# Altium PCB PCB1.PcbDoc
Units mil, origin at the board's own origin, x right, y up, seen from the top; angles counter-clockwise.
Board outline 3000.03 x 4310.03 mil, 2 copper layers (Top Layer, Bottom Layer); 7 components, 5 nets, 17 pads, 2 vias.
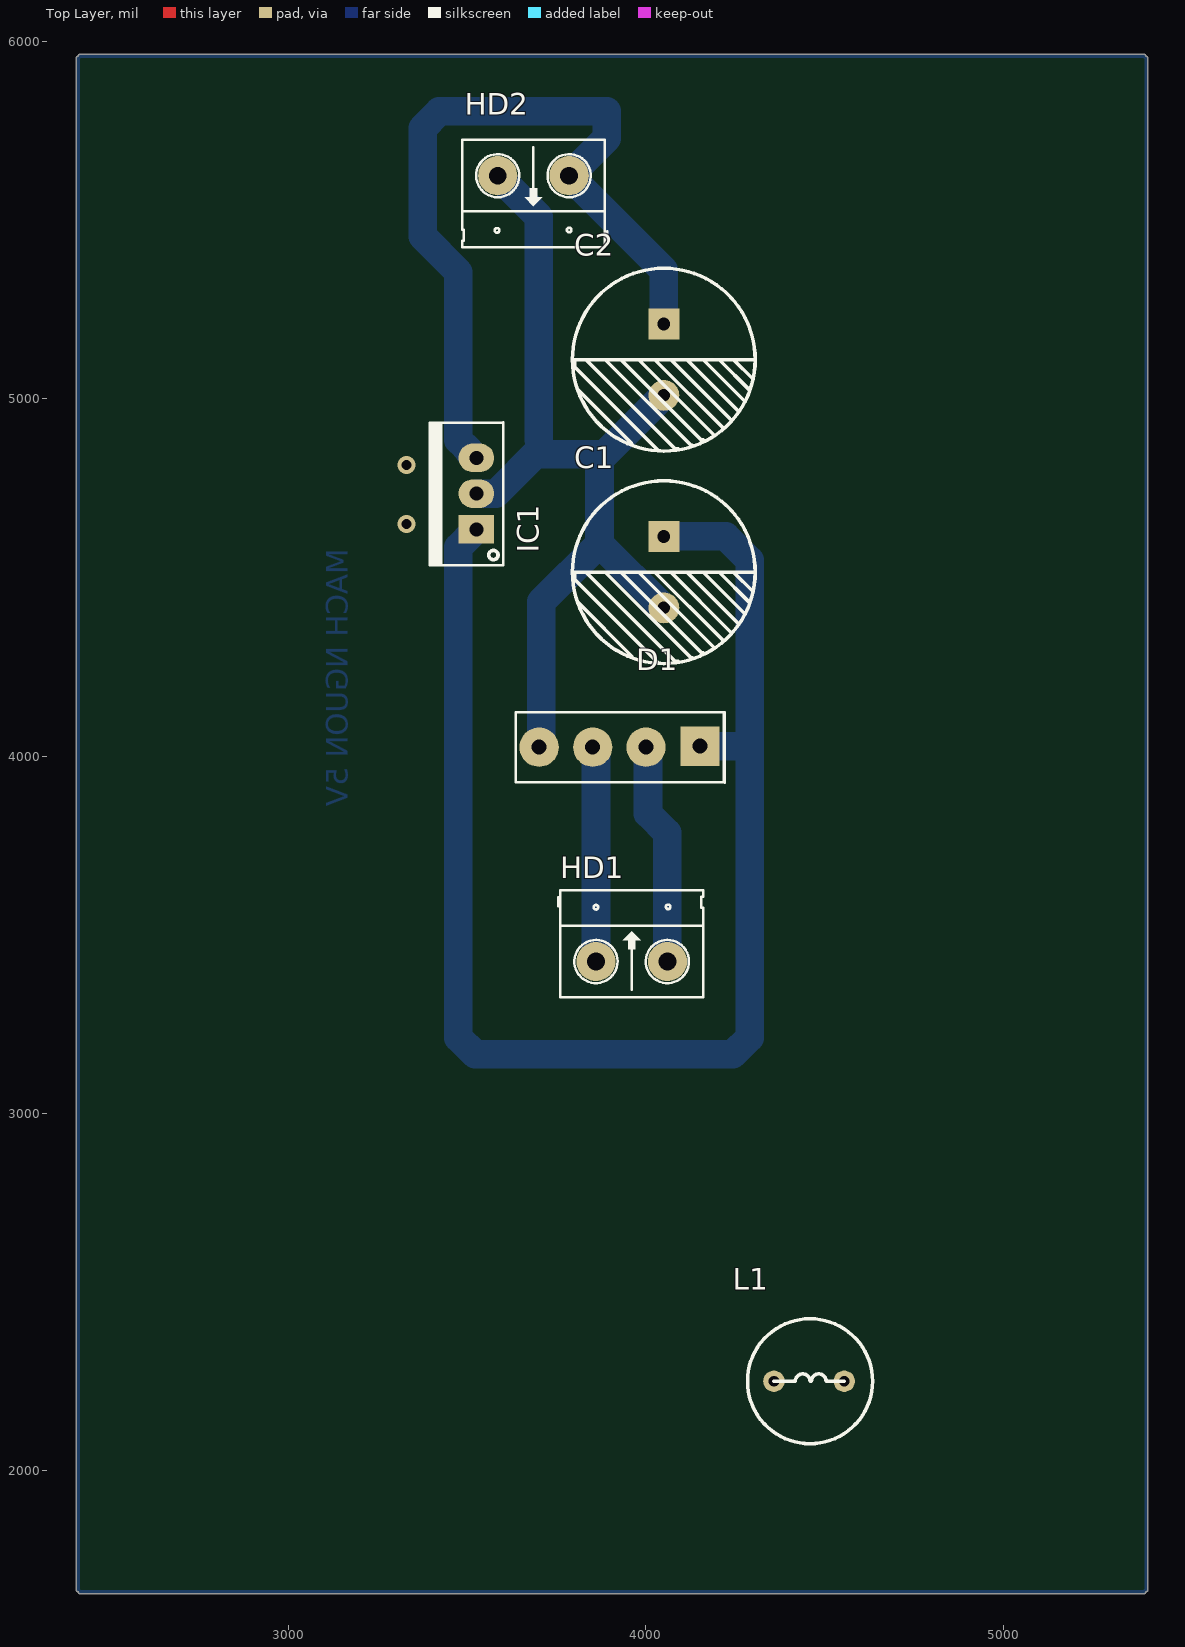
[diagram p0: Top Layer view]
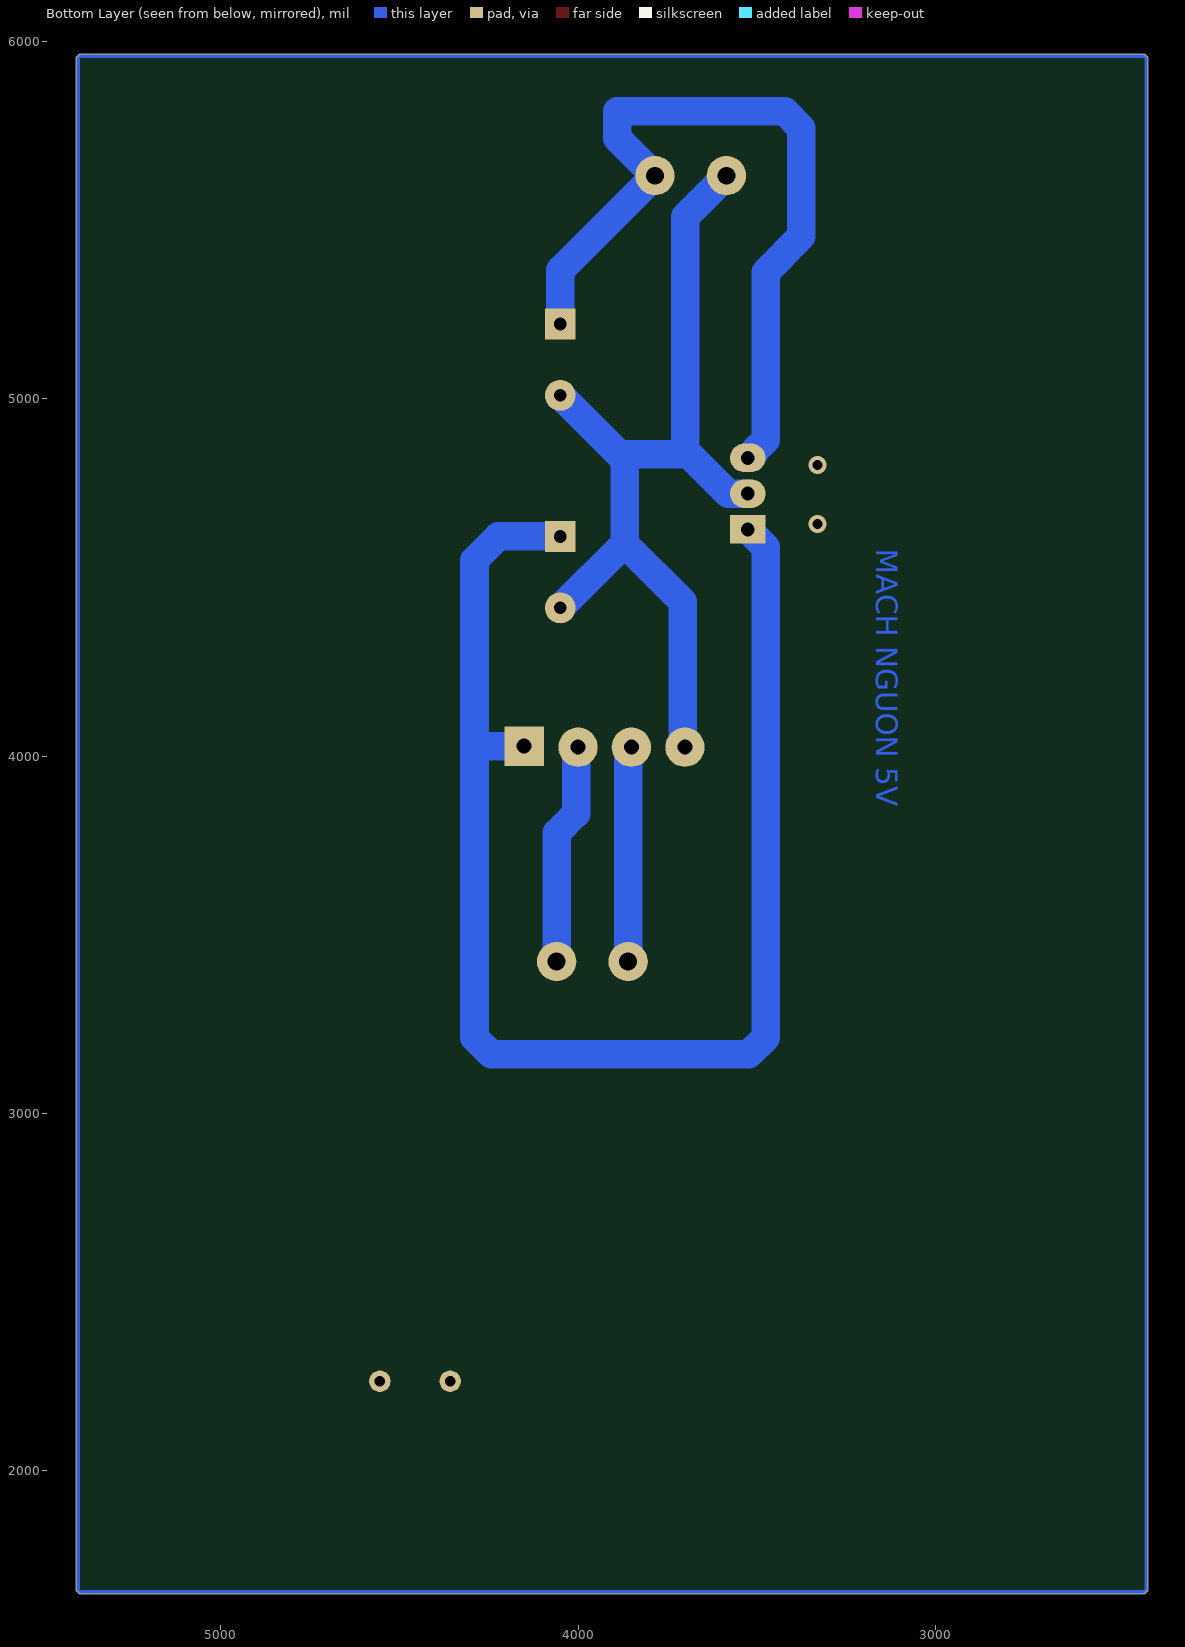
[diagram p1: Bottom Layer view, seen from below]
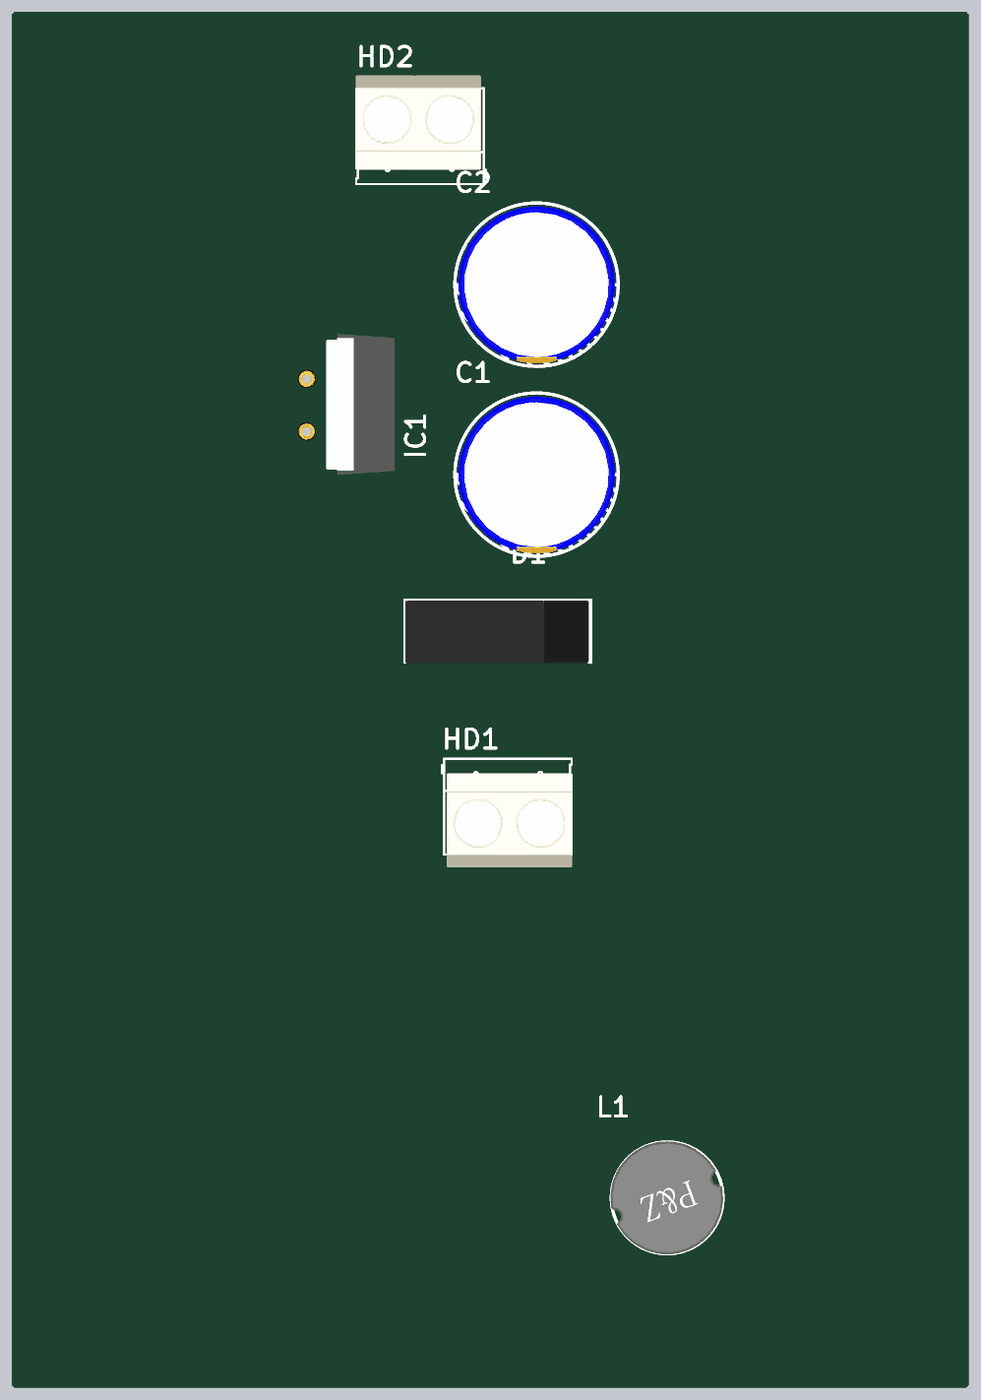
[diagram p2: 3D render of the assembled board from above, using the file's embedded part models]

## Layer stack, top to bottom
Top Solder: solder mask 0.4, Solder Resist, Dk 3.5
Top Layer: signal copper 1.4
Dielectric 1: dielectric 12.6, FR-4, Dk 4.8
Bottom Layer: signal copper 1.4
Bottom Solder: solder mask 0.4, Solder Resist, Dk 3.5

## Board outline
5394.14,1654.98 ccw(c5394.14,1660) 5399.07,1660.93 ccw(c5400,1665.86) 5405.02,1665.86 5405.02,5954.14 ccw(c5400,5954.14) 5400,5959.16 5399.07,5959.07 ccw(c5394.14,5960) 5394.14,5965.02 2415.86,5965.02 ccw(c2415.86,5960) 2410.93,5959.07 2410,5959.16 ccw(c2410,5954.14) 2404.99,5954.14 2404.99,1665.86 ccw(c2410,1665.86) 2410.93,1660.93 ccw(c2415.86,1660) 2415.86,1654.98

## Design rules (kind name [scope] priority, off if disabled: settings)
Clearance [All] p1: gap=20 ignorepadtopadclearanceinfootprint=FALSE
PolygonConnect [All] p1: connectstyle=Relief reliefconductorwidth=10 reliefentries=4 polygonreliefangle="90 Angle" airgapwidth=10
RoutingVias [All] p1: holewidth=28 width=50 viastyle="Through Hole" minholewidth=28 minwidth=50 maxholewidth=28 maxwidth=50
SolderMaskExpansion [All] p1: expansion=4 istentingtop=FALSE
SupplyNets "Schematic Supply Nets" [InNet('GND')] p1: voltage=0.000
Width [All] p1: maxlimit=80 minlimit=80 preferedwidth=80
30 further rules are at their usual default settings.

## Components (designator, comment, footprint, x,y, rotation, side; value= is the part's Value field where it differs from the comment)
C1 "1000uF" "tu hoa 13mm" 4050,4515 r270 top
C2 "1000uF" "tu hoa 13mm" 4050,5110 r270 top
D1 "2A 600V" "DIODE CAU 2A 3A CAM" 4151,4026 r180 top
HD1 "Header 2" HED2 3860,3425 r0 top
HD2 "Header 2" HED2 3785,5625 r180 top
IC1 "LM7805" QTO-220 3525,4635 r90 top
L1 "Inductor" Inductor 4358.15,2250 r0 top

## Footprints (in the part's own frame and the unit in brackets; to place one, negate y for a bottom-side part, rotate by r counter-clockwise, add the part's x,y. Pads: shape width x height; smd on the part's side, far side on the other; paste and mask are expansions set on the pad)
"DIODE CAU 2A 3A CAM" [mil] "DIODE CAU 2A 3A CAM"
  rect 110x110 hole 42: 1(0,-2)
  round 110 hole 42: 2(151,1) 3(300,1) 4(450,1)
  silkscreen extent -70,-97 515,100, body extent -62,-95 512,102, height 650
HED2 [mil] "Header 2, 2 pin, hight 300mil, Pin to Pin 200, Colour Green"
  round 110 hole 50: 1(0,0) 2(200,0)
  silkscreen extent -106,-100 300,200, body extent -92,-140 302,155, height 394
Inductor [mil]
  round 60 hole 30: 1(0,0) 2(196.85,0)
  silkscreen extent -74,-175 276,175, body extent -125,-226 325,226, height 591
QTO-220 [mil] "TO-220 - 1-2-3"
  rect 80x100 hole 39: 1(0,0)
  oval 80x100 hole 39: 2(100,0) 3(200,0)
  silkscreen extent -100,-76 300,130, body extent -121,-85 321,100, height 755
"tu hoa 13mm" [mm]
  rect 2.2x2.2 hole 0.9: 1(-2.54,0)
  round 2.2 hole 0.9: 2(2.54,0)
  silkscreen extent -6.5,-6.5 6.5,6.5, body extent -6.25,-6.25 6.26,6.25, height 23.02

## Part data
C1 C2: library part "Tu Hoa 1000uF 50V 13x26", "Cắm", Chung_Loai=Cắm, Don_Vi=Con, Ma_Hang=MH006619, So_Chan=2, Ten_Linh_Kien="Tụ Hóa 1000uF 50V"
D1: library part "Diode CAU 2A VUONG", "Cắm", Chung_Loai=Cắm, Don_Vi=Con, Ma_Hang=MH001206, Ten_Linh_Kien="Diode Cầu 2A 600V KBP206 Vuông"
HD1 HD2: library part Hed2, "Header 2 (Green)"
IC1: library part LM78xx, "On ap +, from + 5 to + 24VDC"

## Via types
v1: diameter 50, hole 28, Top Layer to Bottom Layer, 2 vias

## Nets (pads, with @x,y where several pads share a name; then routed paths per layer and width w, separated by ;. In a path a pad name is that pad's centre, name@x,y a point inside that pad or via, vN(x,y) a via of type N, cw(c..) or ccw(c..) an arc to the next point about the centre after c; other vN are vias at no path point)
GND: C1.2 C2.2 D1.4 HD2.2 IC1.2 | length 2591.5
  Bottom Layer w80: IC1.2 3580,4735 3700,4855 ; HD2.2 3700,5510 3700,4885 ; 3690,4845 3700,4845 3885,4845 ; D1.4 3706.74,4030.74 3706.74,4431.74 3870,4595 ; C1.2 3870,4595 ; C2.2 3910,4870 3870,4830 3870,4595
NetC1_1: C1.1 D1.1 IC1.1 | length 4046.5
  Bottom Layer w80: IC1.1 3515,4635 3515,4625 3475,4585 3475,3211.86 3521.86,3165 4243.14,3165 4290,3211.86 4290,4028 ; C1.1 4223.14,4615 4290,4548.14 4290,4028 ; D1.1 4290,4028
NetC2_1: C2.1 HD2.1 IC1.3 | length 2270.6
  Bottom Layer w60: IC1.3@3505,4850.41 3520.41,4835 IC1.3
  Bottom Layer w80: IC1.3@3505,4850.41 3505,4855 3475,4885 3475,5355 3375,5455 3375,5758.14 3421.86,5805 3890,5805 3890,5730 HD2.1 4050,5360 C2.1
NetD1_2: D1.2 HD1.2 | length 624.9
  Bottom Layer w80: D1.2 4005.74,4019.26 4005.74,3839.26 4060,3785 HD1.2
NetD1_3: D1.3 HD1.1 | length 603.7
  Bottom Layer w80: D1.3 3851,4016.88 3860,4007.88 HD1.1
pads on no net: L1.1 L1.2
copper on no net: | length 14566.3
  Bottom Layer w10: 2410,1665.86 2415.86,1660 5394.14,1660 5400,1665.86 5400,5954.14 5394.14,5960 2415.86,5960 2410,5954.14 2410,1665.86
  other v1: 3330,4650 3330,4815

## Other copper
Bottom Layer:
  text "MACH NGUON 5V" at 3165,4580 h60 r90

## Silkscreen, mask and mechanical layers (free items; w line width, h text height)
Mechanical 15:
  text "~" at 9545,7160 h60 r90
  text "~" at 10775,6955 h60 r90